# EAGLE board Stim-A2530 (EAGLE 7.1.0)
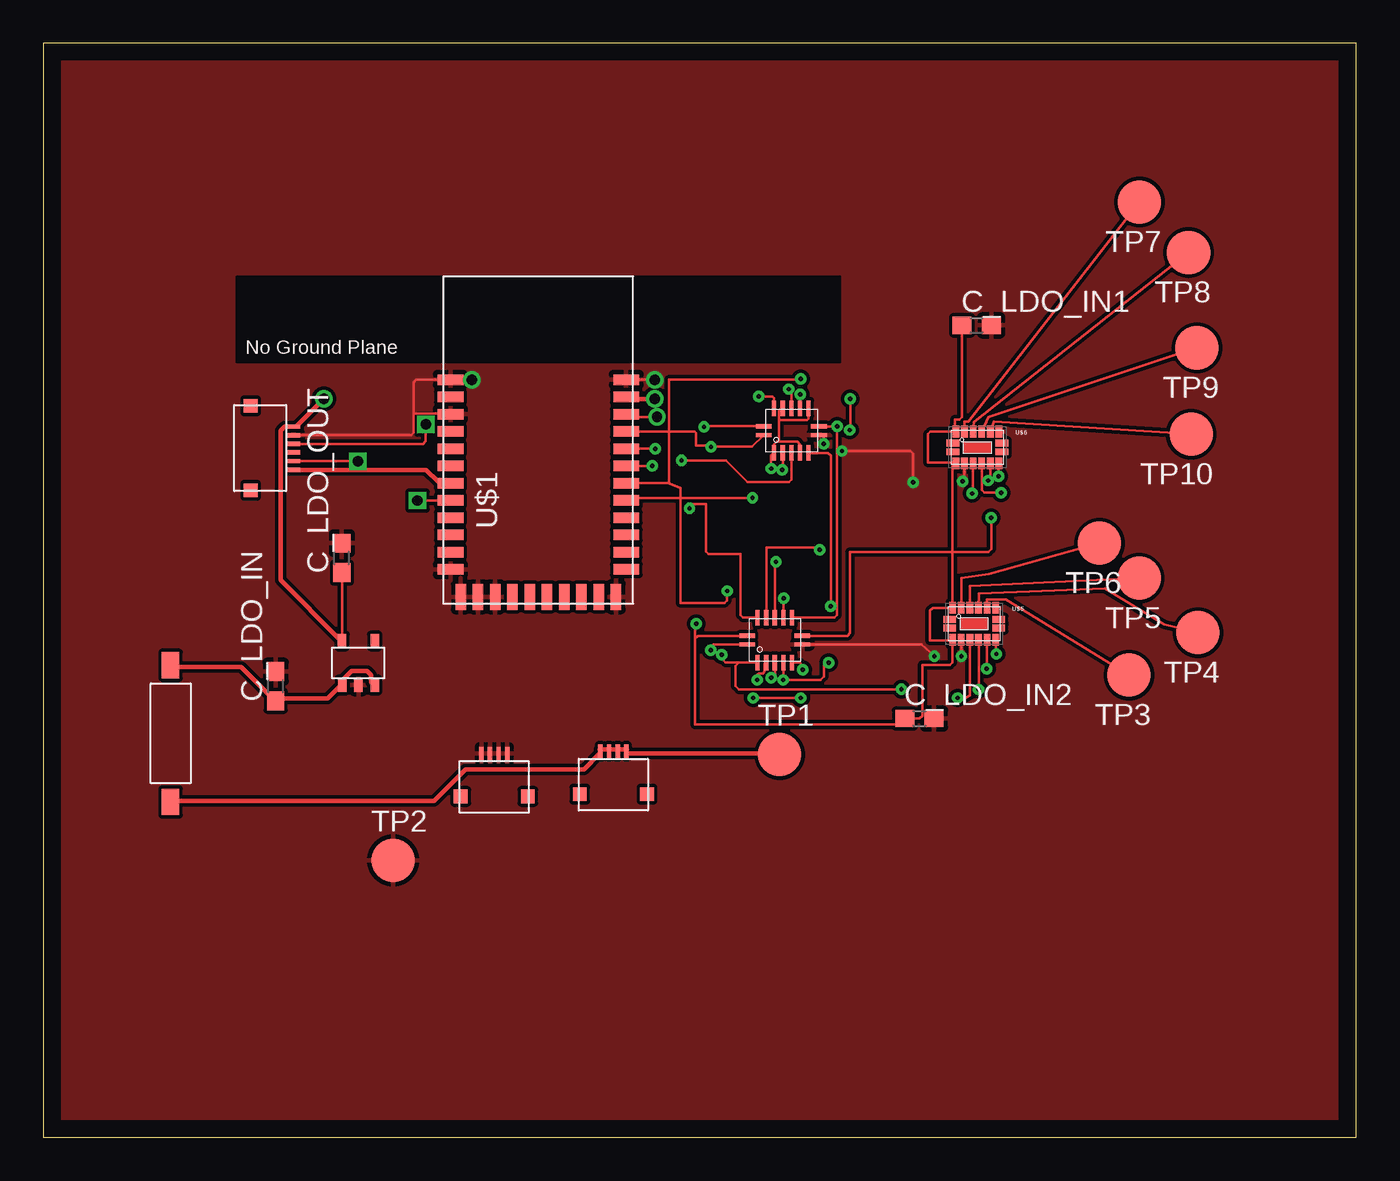
[diagram p0: board, top side]
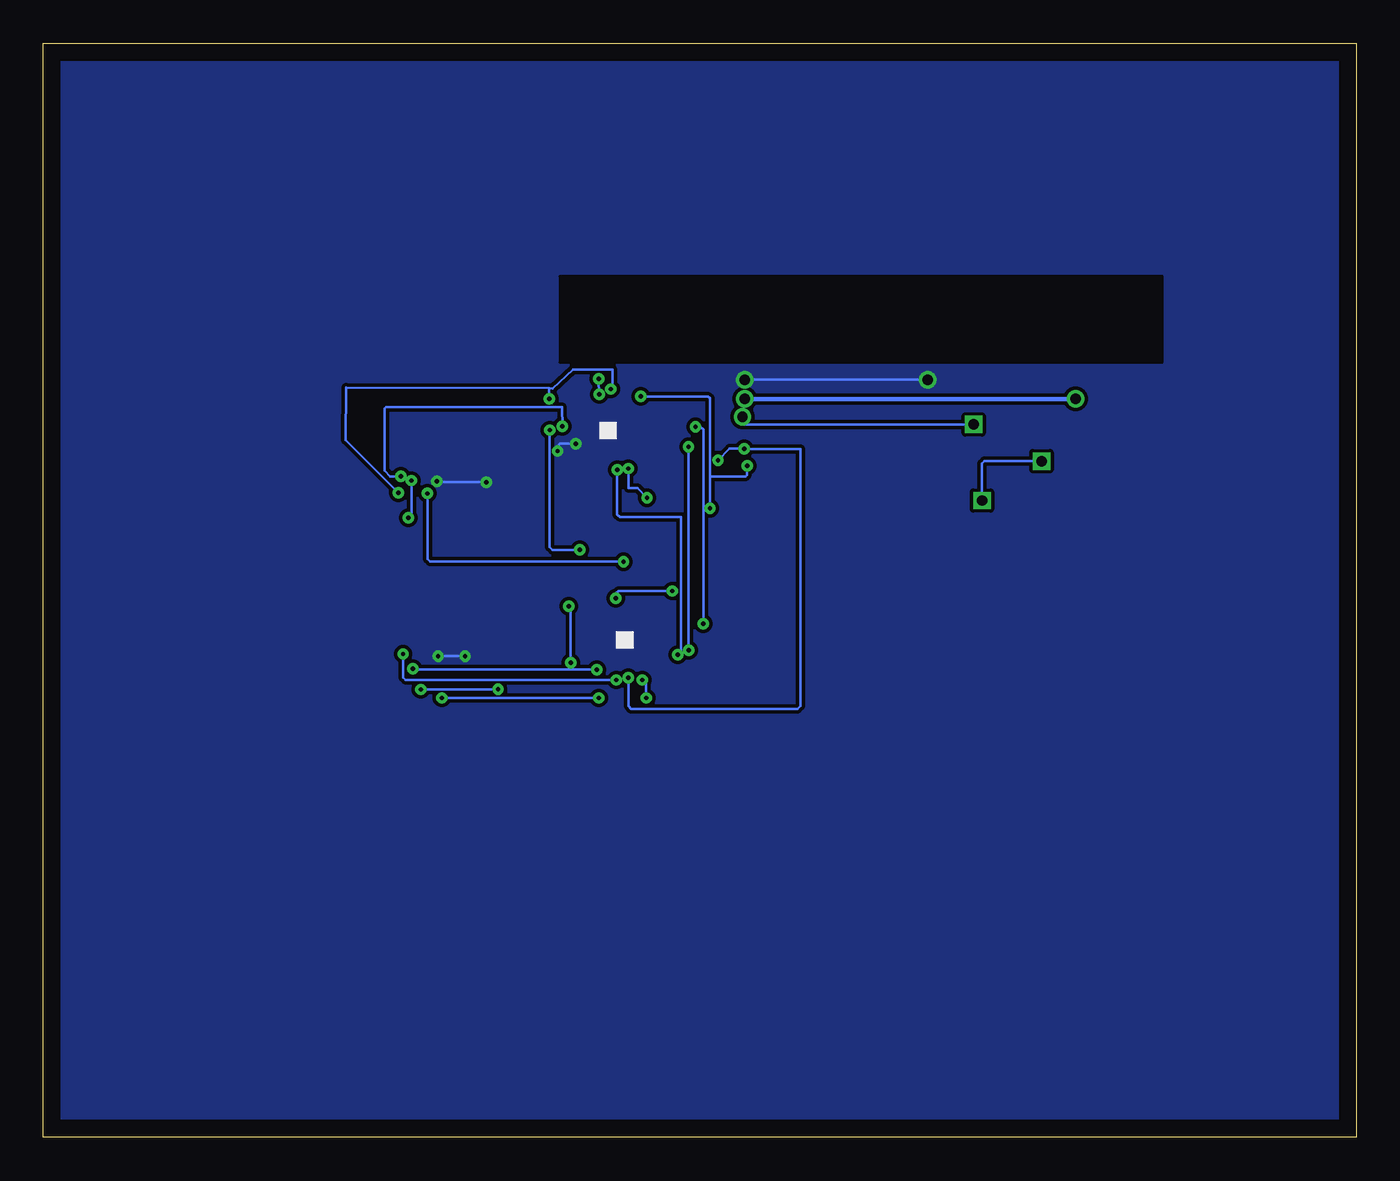
[diagram p1: board, bottom side, seen from below]

Size 76.2 x 63.5 mm. Coordinates in mm from the lower left corner, seen from the top.
Outline: 0,0 76.2,0 76.2,63.5 0,63.5 0,0
Copper layers (1*16): Top 0.035mm / dielectric 1.5mm / Bottom 0.035mm
Design rules "default": minimum track width 10mil, minimum drill 24mil, track to track 8mil, track to pad 8mil, pad to pad 8mil, via to via 8mil, smd to smd 8mil, copper to edge 40mil, drill to drill 8mil, minimum pad ring 10mil, minimum via ring 8mil, stop-mask expansion 4mil, vias tented up to drill 0mil, thermal gap 10mil

## Footprints (pad centres in the part's own frame; a part is rotated, then mirrored left to right if it is on the bottom)
C0603 = smd 1.1 x 1: 1 -0.85,0; 2 0.85,0
B2,54 = smd 2.54 x 2.54: TP 0,0
A2530 = smd 1.5 x 0.61: P$1 -5.1,0; P$2 -5.1,-1; P$3 -5.1,-2; P$4 -5.1,-3; P$5 -5.1,-4; P$6 -5.1,-5; P$7 -5.1,-6; P$8 -5.1,-7; P$9 -5.1,-8; P$10 -5.1,-9; P$11 -5.1,-10; P$12 -5.1,-11; P$23 5.1,-11; P$24 5.1,-10; P$25 5.1,-9; P$26 5.1,-8; P$27 5.1,-7; P$28 5.1,-6; P$29 5.1,-5; P$30 5.1,-4; P$31 5.1,-3; P$32 5.1,-2; P$33 5.1,-1; P$34 5.1,0 | smd 0.61 x 1.5: P$13 -4.5,-12.6; P$14 -3.5,-12.6; P$15 -2.5,-12.6; P$16 -1.5,-12.6; P$17 -0.5,-12.6; P$18 0.5,-12.6; P$19 1.5,-12.6; P$20 2.5,-12.6; P$21 3.5,-12.6; P$22 4.5,-12.6
FFC6POS = smd 0.762 x 0.254: 1 0.008,1.269; 2 0.008,0.769; 3 0.008,0.269; 4 0.008,-0.231; 5 0.008,-0.731; 6 0.008,-1.231 | smd 0.8 x 0.8: P$7 -2.49,2.47; P$8 -2.49,-2.43
QFN-14 = smd 0.9 x 0.24: A0 -1.6,-0.25; GND 1.6,-0.25; O3 1.6,0.25; VCC -1.6,0.25 | smd 0.24 x 0.9: A1 0,-1.3; A2 -1,1.3; A3 0.5,1.3; B0 -1,-1.3; B1 0.5,-1.3; B2 -0.5,1.3; B3 1,1.3; O1 1,-1.3; O2 0,1.3; O_0 -0.5,-1.3; P$11 -1,-1.3
QFN-12-HEATSINK = smd 0.39 x 0.68: AIN1/APHASE -0.25,-0.925; AIN2.AENBL 0.25,-0.925; AOUT1 -0.75,0.925; AOUT2 -0.25,0.925; BIN1/BPHASE 0.75,-0.925; BIN2/BENBL 1.25,-0.925; BOUT1 0.25,0.925; BOUT2 0.75,0.925; GND 1.25,0.925; MODE -0.75,-0.925; VCC -1.25,-0.925; VM -1.25,0.925 | smd 0.74 x 0.39: P$13 -1.425,0.25; P$14 -1.425,-0.25; P$15 1.425,0.25; P$16 1.425,-0.25
FFC4POS = smd 0.762 x 0.254: 1 0.04,0.742; 2 0.04,0.242; 3 0.04,-0.258; 4 0.04,-0.758 | smd 0.8 x 0.8: P$5 -2.46,1.94; P$6 -2.46,-1.96
SWITCH_MANUAL = smd 1.524 x 1.016: 1 -4.13,0; 2 3.81,0
REGULATOR = smd 0.5 x 0.8: 1 0.94,1.275; 2 0,1.275; 3 -0.95,1.275; 4 -0.95,-1.275; 5 0.95,-1.275

## Placement (x,y rotation side)
C_LDO_IN  1uF  [C0603]  13.5,26.18 90 top
C_LDO_IN1  .1uF  [C0603]  54.17,47.12 0 top
C_LDO_IN2  .1uF  [C0603]  50.85,24.31 0 top
C_LDO_OUT  2.2uF  [C0603]  17.33,33.63 90 top
TP1  PTR1B2,54  [B2,54]  42.73,22.22 0 top
TP2  PTR1B2,54  [B2,54]  20.3,16.08 0 top
TP3  PTR1B2,54  [B2,54]  63,26.83 180 top
TP4  PTR1B2,54  [B2,54]  67,29.29 180 top
TP5  PTR1B2,54  [B2,54]  63.6,32.45 180 top
TP6  PTR1B2,54  [B2,54]  61.29,34.49 180 top
TP7  PTR1B2,54  [B2,54]  63.61,54.27 180 top
TP8  PTR1B2,54  [B2,54]  66.46,51.35 180 top
TP9  PTR1B2,54  [B2,54]  66.95,45.82 180 top
TP10  PTR1B2,54  [B2,54]  66.61,40.8 180 top
U$1  A2530  [A2530]  28.74,43.96 0 top
U$2  FFC6POS  [FFC6POS]  14.54,39.98 0 top
U$3  AND_QUAD  [QFN-14]  43.42,41.02 0 top
U$4  XOR_QUAD  [QFN-14]  42.45,28.86 0 top
U$5  DRV8835  [QFN-12-HEATSINK]  54.02,29.81 0 top
U$6  DRV8835  [QFN-12-HEATSINK]  54.21,40.04 0 top
U$7  FFC4POS  [FFC4POS]  33.08,22.37 90 top
U$8  FFC4POS  [FFC4POS]  26.17,22.25 90 top
U$18  SWITCH_MANUAL  [SWITCH_MANUAL]  7.4,23.59 90 top
VREG1  REGULATOR  [REGULATOR]  18.3,27.53 180 top

## Library data of the parts
C_LDO_IN C_LDO_IN1 C_LDO_IN2 C_LDO_OUT = resistor
TP1-TP10 = testpad
U$1 U$2 U$7 U$8 U$18 VREG1 = CC2530_PCB_TL
U$3-U$6 = kushal

## Nets
+3V0: C_LDO_OUT.1 U$1.P$33 U$2.1 VREG1.5
+3V3: C_LDO_IN1.1 C_LDO_IN2.1 U$3.VCC U$4.VCC U$5.VCC U$5.VM U$6.VCC U$6.VM
BCLK: U$1.P$27 U$3.B0 U$3.B1 U$3.B2 U$3.B3
GND: C_LDO_IN1.2 C_LDO_IN2.2 C_LDO_IN.2 C_LDO_OUT.2 TP2.TP U$1.P$1 U$1.P$3 U$1.P$12 U$1.P$13 U$1.P$14 U$1.P$15 U$1.P$22 U$1.P$34 U$2.2 U$3.GND U$4.GND U$5.GND U$5.MODE U$6.GND U$6.MODE U$8.1 U$8.2 U$8.3 U$8.4 VREG1.2
N$4: TP1.TP U$7.1 U$7.2 U$7.3 U$7.4 U$18.1
N$18: TP7.TP U$6.AOUT1
N$19: TP8.TP U$6.AOUT2
N$20: TP9.TP U$6.BOUT1
N$21: TP10.TP U$6.BOUT2
N$38: TP6.TP U$5.AOUT1
N$39: TP5.TP U$5.AOUT2
N$40: TP4.TP U$5.BOUT1
N$41: TP3.TP U$5.BOUT2
NEG1: U$3.O_0 U$4.B0 U$5.AIN2.AENBL
NEG2: U$3.O1 U$4.B1 U$5.BIN2/BENBL
NEG3: U$3.O2 U$4.B2 U$6.AIN2.AENBL
NEG4: U$3.O3 U$4.B3 U$6.BIN2/BENBL
P1: U$1.P$31 U$3.A0 U$4.A0
P2: U$1.P$30 U$3.A1 U$4.A1
P2_1: U$1.P$8 U$2.5
P2_2: U$1.P$7 U$2.6
P3: U$1.P$29 U$3.A2 U$4.A2
P4: U$1.P$28 U$3.A3 U$4.A3
POS1: U$4.O_0 U$5.AIN1/APHASE
POS2: U$4.O1 U$5.BIN1/BPHASE
POS3: U$4.O2 U$6.AIN1/APHASE
POS4: U$4.O3 U$6.BIN1/BPHASE
RESET_N: U$1.P$32 U$2.3
V+: C_LDO_IN.1 U$18.2 VREG1.1 VREG1.3

## Tracks (layer width: path | path; a pad name or v marks a point on that pad's centre or on a via)
+3V0  (via drill 0.61)
  Top 0.152: C_LDO_OUT.1 17.35,32.76 VREG1.5
  Top 0.254: VREG1.5 17.2,28.9 13.77,32.33 13.77,41.02 14,41.25 14.46,41.25 U$2.1 14.69,41.25 v16.29,42.85 | v35.49,42.85 33.89,42.85 U$1.P$33
  Bottom 0.254: v16.29,42.85 v35.49,42.85
+3V3  (via drill 0.25 pad 0.25)
  Top 0.152: C_LDO_IN1.1 53.32,41.81 53.17,41.65 52.92,41.65 52.92,41.01 U$6.VM 51.48,40.96 51.33,40.81 51.33,39.15 52.92,39.15 U$6.VCC 52.93,39.11 52.77,38.96 U$5.VM 51.62,30.73 51.47,30.58 51.47,28.84 52.73,28.84 U$5.VCC 52.77,27.56 52.62,27.41 51.01,27.41 51.01,24.46 50.86,24.3 C_LDO_IN2.1 50,24.11 49.85,23.95 37.84,23.95 37.84,28.96 | U$4.VCC 37.99,29.11 37.84,28.96 | U$3.VCC 38.39,41.27 v38.35,41.22 | v37.89,29.8 37.84,29.75 37.84,28.96
  Bottom 0.152: v38.35,41.22 38.04,41.22 37.89,41.07 v37.89,29.8
BCLK  (via drill 0.25 pad 0.25)
  Top 0.152: 42.89,42.34 U$3.B2 42.86,42.32 42.71,42.16 42.71,41.61 | 42.71,41.61 42.71,40.37 | 42.71,40.37 42.57,40.37 42.42,40.21 U$3.B0 42.4,39.72 42.24,39.56 v42.24,38.81 | U$3.B1 43.92,40.21 43.76,40.37 42.71,40.37 | U$1.P$27 33.98,37.11 v41.16,37.11 | U$3.B3 44.42,41.71 44.31,41.61 42.71,41.61
  Bottom 0.025: v42.24,38.81 42.2,38.81
  Bottom 0.152: v41.16,37.11 41.72,37.67 42.24,37.67 v42.24,38.81
GND  (via drill 0.25 pad 0.25, 0.6)
  Top 0.152: 21.5,42.01 21.5,43.81 21.65,43.97 U$1.P$1 v24.87,43.97 | 21.5,42.01 23.59,42.01 U$1.P$3 | U$2.2 21.34,40.75 21.5,40.9 21.5,42.01 | v35.49,43.97 U$1.P$34 | U$3.GND 45.14,40.77 45.3,40.61 v45.3,40.25 | v46.35,39.83 50.32,39.83 50.48,39.67 v50.48,38.02 | v53.35,38.06 53.46,38.17 U$6.MODE | U$4.GND 50.95,28.61 v51.71,27.93 | v53.28,27.93 U$5.MODE
  Bottom 0.152: v24.87,43.97 v35.49,43.97 | v45.3,40.25 46.2,40.25 46.35,40.1 v46.35,39.83 | v50.48,38.02 53.31,38.02 v53.35,38.06 | v51.71,27.93 53.2,27.93 v53.28,27.93
  pour Top: 0,63.5 76.2,63.5 76.2,0 0,0
  pour Bottom: 0,63.5 76.2,63.5 76.2,0 0,0
N$4
  Top 0.254: 32.75,22.5 32.29,22.5 U$7.1 32.29,22.27 31.38,21.36 24.52,21.36 22.69,19.53 7.6,19.53 U$18.1 | 33.43,22.5 33.89,22.5 U$7.4 33.89,22.27 42.58,22.27 TP1.TP | 33.43,22.5 32.75,22.5 | 32.75,22.5 U$7.2 | 33.43,22.5 U$7.3
N$18
  Top 0.152: U$6.AOUT1 53.46,41.53 53.69,41.53 TP7.TP
N$19
  Top 0.152: TP8.TP 54.02,41.5 U$6.AOUT2
N$20
  Top 0.152: U$6.BOUT1 54.86,41.81 TP9.TP
N$21
  Top 0.152: U$6.BOUT2 55.16,41.54 TP10.TP
N$38
  Top 0.152: U$5.AOUT1 53.27,32.45 54.88,32.7 TP6.TP
N$39
  Top 0.152: TP5.TP 53.77,32 U$5.AOUT2
N$40
  Top 0.152: U$5.BOUT1 54.28,31.56 61.62,31.84 65.04,29.77 TP4.TP
N$41
  Top 0.152: TP3.TP 55.85,31.21 54.77,31.21 U$5.BOUT2
NEG1  (via drill 0.25 pad 0.25)
  Top 0.152: v54.29,26 54.29,28.78 U$5.AIN2.AENBL | v39.38,28 39.38,27.76 39.59,27.56 U$4.B0 40.36,27.56 40.16,27.36 40.16,26.19 40.36,25.99 v49.79,25.99 v49.8,26 | v42.89,38.73 42.92,38.76 U$3.O_0
  Bottom 0.152: v49.8,26 v54.29,26 | v39.38,28 39.35,28 39.2,28.16 39.2,35.99 42.74,35.99 42.89,36.15 v42.89,38.73
NEG2  (via drill 0.25 pad 0.25)
  Top 0.152: U$5.BIN2/BENBL 55.27,28.09 v55.31,28.05 | U$3.O1 45.55,39.72 45.7,39.56 v45.7,30.83 | v45.59,27.54 45.45,27.54 45.3,27.39 45.3,26.75 45.09,26.55 v42.95,26.55 42.95,27.52 U$4.B1
  Bottom 0.152: v55.31,28.05 55.31,26.7 55.16,26.55 v42.95,26.55 | v45.7,30.83 45.59,30.72 v45.59,27.54
NEG3  (via drill 0.25 pad 0.25)
  Top 0.152: v55.59,37.42 54.61,37.42 54.46,37.57 U$6.AIN2.AENBL | U$4.B2 41.97,30.17 41.97,34.23 44.93,34.23 v45.06,34.1 | v46.8,41.04 46.83,41.07 v46.83,42.86 | U$3.O2 43.42,43.32 43.31,43.42 v43.27,43.42
  Bottom 0.152: 46.84,43.48 46.63,43.46 45.46,44.56 43.17,44.56 43.17,43.52 v43.27,43.42 | 46.84,43.48 58.62,43.5 58.64,40.46 v55.59,37.42 | v45.06,34.1 46.65,34.1 46.8,34.25 v46.8,41.04 | v46.83,42.86 46.84,42.88 46.84,43.48
NEG4  (via drill 0.25 pad 0.25)
  Top 0.152: U$6.BIN2/BENBL 55.44,39.09 v55.44,38.36 | U$3.O3 45.03,41.26 v46.07,41.26 46.07,30.31 45.92,30.16 U$4.B3
  Bottom 0.152: 55.82,38.36 v55.44,38.36 56.06,38.36 56.38,38.69 56.38,42.29 56.28,42.39 46.08,42.39 v46.07,41.26
P1  (via drill 0.25 pad 0.25)
  Top 0.152: U$4.A0 38.89,28.61 38.73,28.46 v38.73,28.27 | U$1.P$31 37.78,40.97 37.88,40.86 37.88,40.14 38.7,40.14 v38.76,40.08 41.13,40.08 U$3.A0
  Bottom 0.152: v38.73,28.27 38.76,28.29 v38.76,40.08
P2  (via drill 0.25 pad 0.25)
  Top 0.152: U$3.A1 43.42,38.19 43.26,38.04 40.87,38.04 39.62,39.29 v37.04,39.29 | U$4.A1 42.45,26.82 42.3,26.67 v42.24,26.67 | v35.53,39.97 U$1.P$30
  Bottom 0.152: v42.24,26.67 42.24,25.03 42.09,24.87 32.42,24.87 32.27,25.03 32.27,39.95 35.52,39.95 v35.53,39.97 36.37,39.97 v37.04,39.29
P2_1  (via drill 0.6)
  Top 0.152: U$2.5 v18.27,39.25 v18.27,39.24 | v21.73,36.95 23.62,36.95 U$1.P$8
  Bottom 0.152: v18.27,39.24 21.57,39.24 21.73,39.09 v21.73,36.95
P2_2
  Top 0.254: U$2.6 14.69,38.73 22.23,38.73 22.92,38.05 23.6,38.05 U$1.P$7
P3  (via drill 0.25 pad 0.25)
  Top 0.152: U$1.P$29 v35.35,38.97 | U$4.A2 40.6,30.16 40.45,30.31 40.45,33.84 38.62,33.84 38.47,33.99 38.47,36.75 37.66,36.75 37.5,36.6 v37.5,36.52 | v41.51,43 42.31,43 42.42,42.9 U$3.A2
  Bottom 0.152: 37.52,36.53 v37.5,36.52 v37.51,36.52 37.51,38.34 | v35.35,38.97 35.35,38.44 35.45,38.34 37.51,38.34 | 37.51,38.34 37.51,42.9 37.61,43 v41.51,43
  other vias: 35.35,38.96
P4  (via drill 0.25 pad 0.25)
  Top 0.152: U$3.A3 v43.93,43.13 | 36.31,37.97 36.33,43.97 43.92,43.97 v43.96,44.02 | 36.31,37.97 36.34,37.97 U$1.P$28 | 36.31,37.97 36.34,37.94 36.99,37.68 36.99,31.01 39.53,31.01 39.69,31.16 v39.69,31.71 | v42.98,31.28 42.95,31.25 U$4.A3
  Bottom 0.152: v43.93,43.13 43.97,43.99 v43.96,44.02 | v39.69,31.71 42.82,31.71 42.98,31.55 v42.98,31.28
POS1  (via drill 0.25 pad 0.25)
  Top 0: U$4.O_0 41.86,27.56 | 41.86,27.56 | 41.86,27.56 41.87,27.56 41.94,27.49
  Top 0.025: 41.94,27.49 41.92,27.49 41.86,27.56
  Top 0.152: U$5.AIN1/APHASE 53.78,28.77 53.78,25.64 53.52,25.5 v53.06,25.5 | v41.21,25.5 43.92,25.5 v43.96,25.5 | v41.43,26.54 41.43,26.82 41.53,26.93 41.76,26.93 41.86,27.03 41.86,27.47 U$4.O_0
  Bottom 0.152: v41.43,26.54 41.36,26.54 41.21,26.39 v41.21,25.5 | v43.96,25.5 v53.06,25.5
POS2  (via drill 0.25 pad 0.25)
  Top 0.152: U$5.BIN1/BPHASE 54.77,27.22 v54.75,27.2 | v44.07,27.15 44.07,27.41 43.92,27.56 U$4.O1
  Bottom 0.152: v54.75,27.2 54.7,27.15 v44.07,27.15
POS3  (via drill 0.25 pad 0.25)
  Top 0.152: U$4.O2 42.45,33.34 v42.52,33.41 | v53.9,37.37 53.96,37.43 U$6.AIN1/APHASE
  Bottom 0.152: v42.52,33.41 53.74,33.41 53.9,33.57 v53.9,37.37
POS4  (via drill 0.25 pad 0.25)
  Top 0.152: U$4.O3 46.67,29.11 46.83,29.26 46.83,33.98 54.86,33.98 55.01,34.13 v55.01,35.95 | v54.83,38.12 54.96,38.25 U$6.BIN1/BPHASE
  Bottom 0.152: v55.01,35.95 54.98,35.95 54.83,36.1 v54.83,38.12
RESET_N  (via drill 0.6)
  Top 0.152: U$2.3 22.05,40.25 22.21,40.4 v22.21,41.37 | v35.62,41.81 33.99,41.81 U$1.P$32
  Bottom 0.152: v22.21,41.37 35.47,41.37 35.62,41.53 v35.62,41.81
V+
  Top 0.254: VREG1.3 19.03,26.39 19.03,26.84 18.8,27.07 17.89,27.07 17.43,26.62 17.43,26.39 VREG1.1 17.2,26.16 16.52,25.47 13.55,25.47 C_LDO_IN.1 13.32,25.47 11.49,27.3 7.6,27.3 U$18.2